# Allegro board PiModProtoMini_R0A.brd
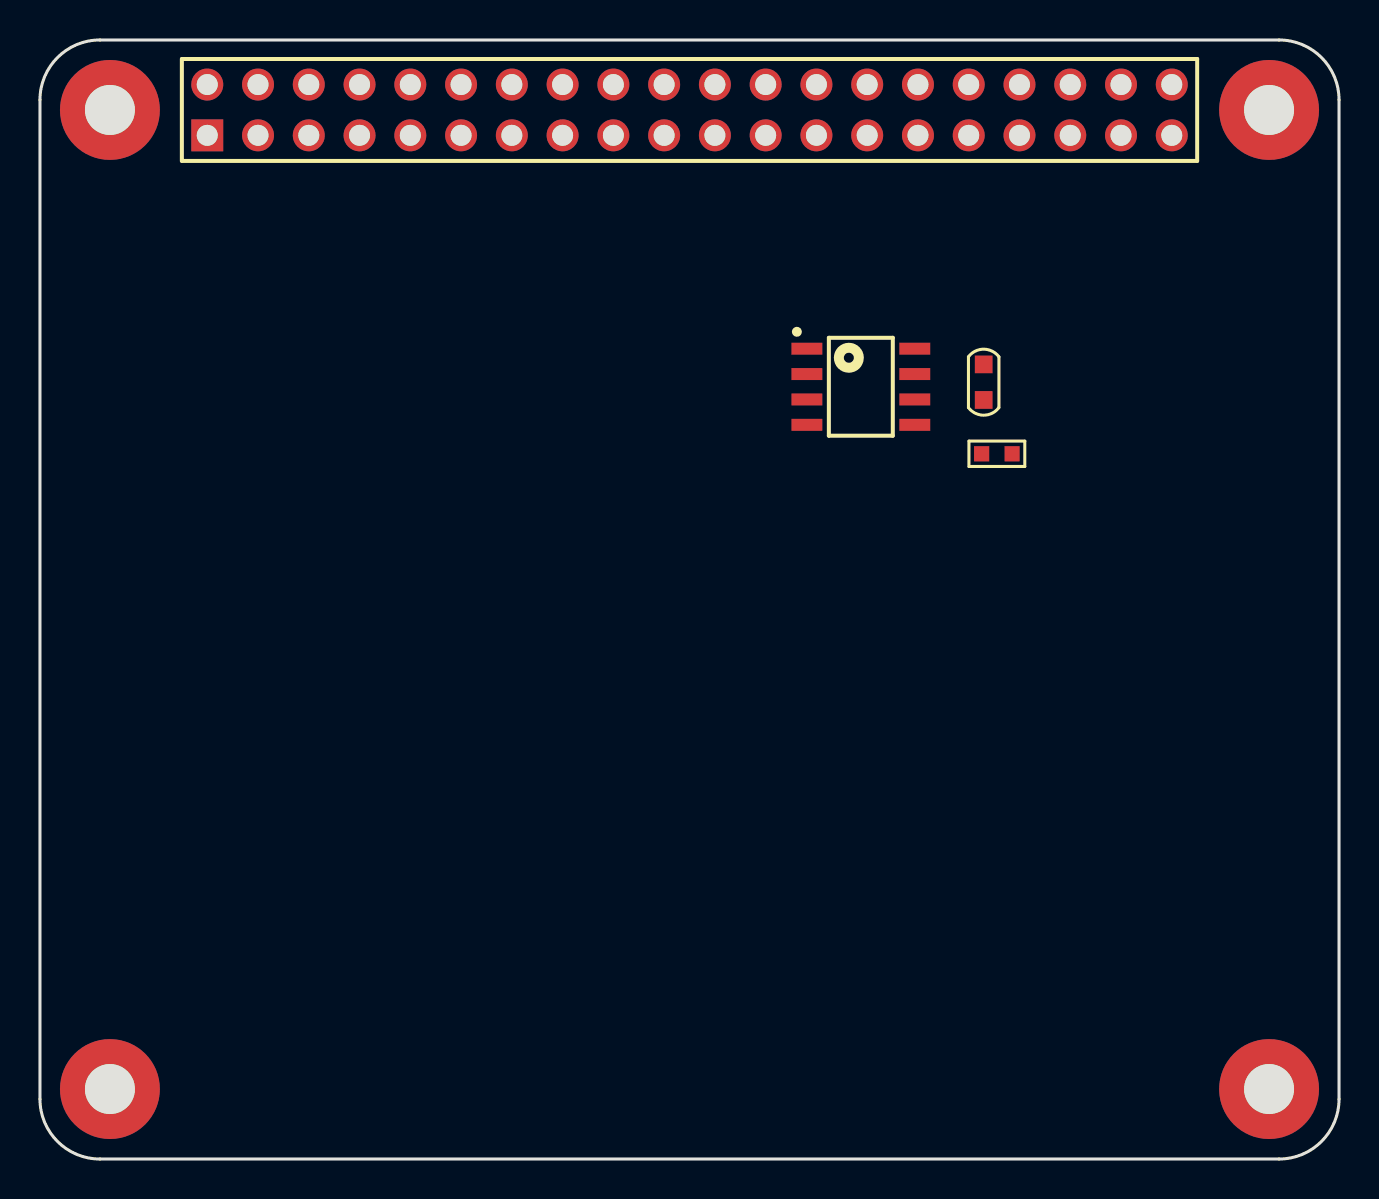
[diagram p0: board, top side]
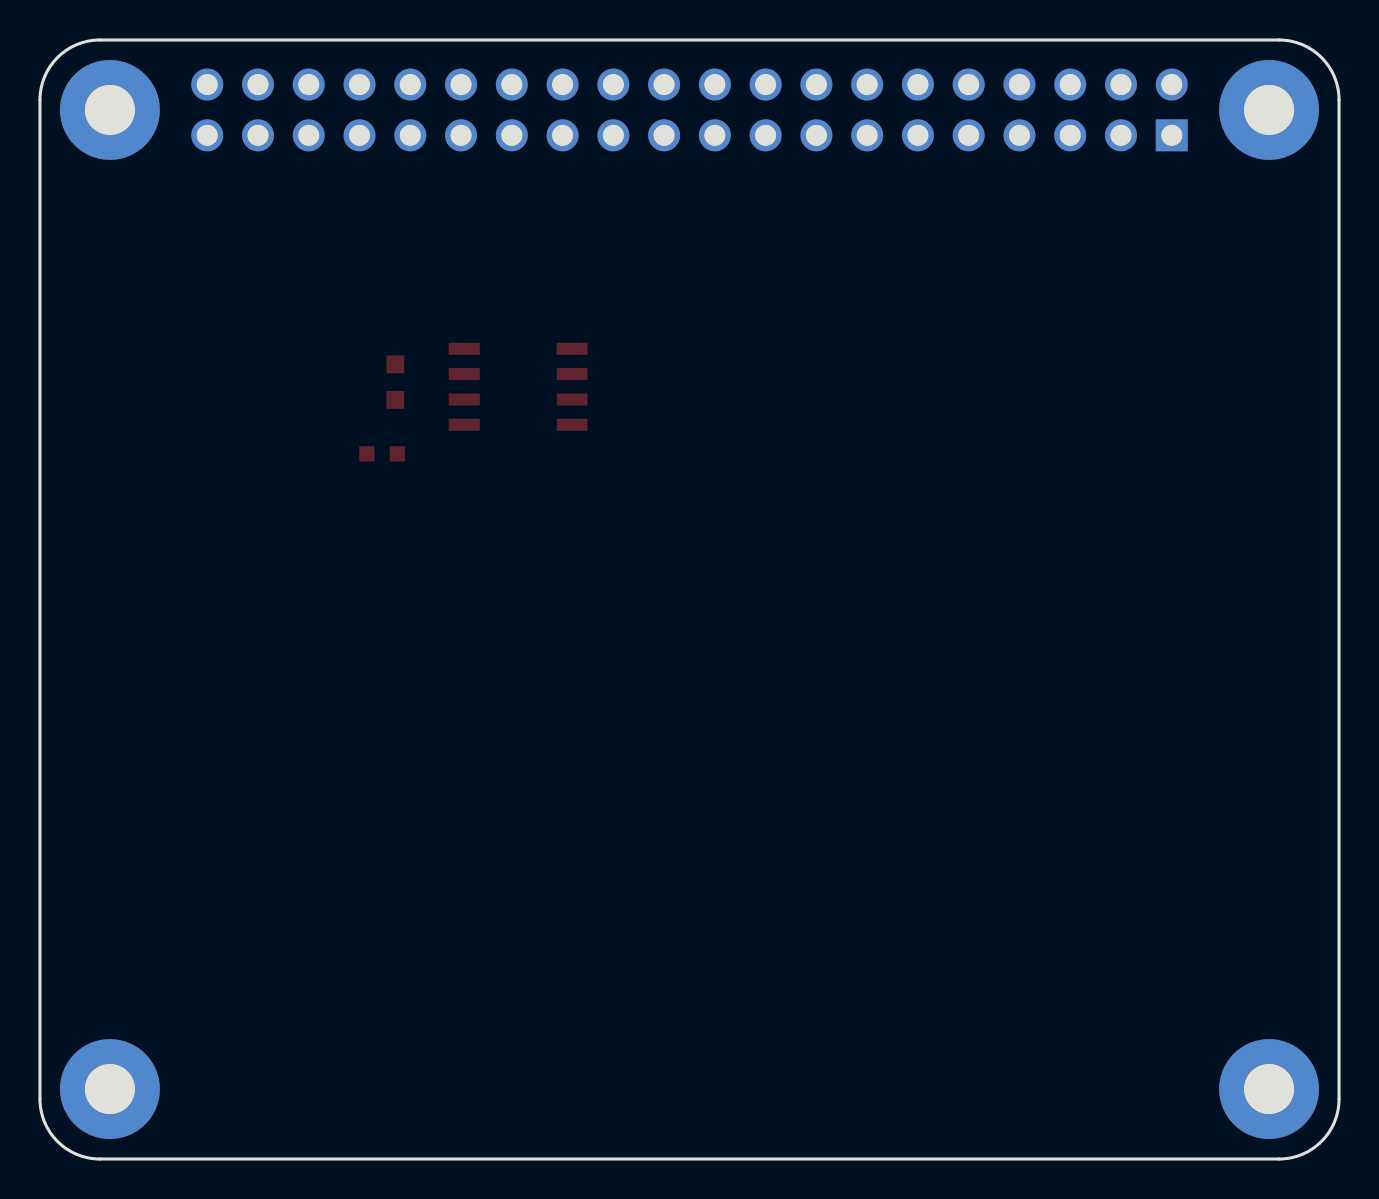
[diagram p1: board, bottom side, seen from below]

Outline 65 x 55.98 mm; copper layers: TOP, BOTTOM. Coordinates in mm from the lower left corner of the outline.
Outline path: 0,52.98 0,3 arc(0.88,0.88) 3,0 62,0 arc(64.12,0.88) 65,3 65,52.98 arc(64.12,55.1) 62,55.98 3,55.98 arc(0.88,55.1) 0,52.98

## Placement (name value [footprint] x y rotation side)
C1  0.1uF  [C0603]  47.22 38.86 0 top
J1  RPI CON  [SIP20X2]  8.37 51.21 0 top
R1  4.7K  [R0603]  47.12 35.28 0 top
TH1  -  [TH2_5]  3.5 3.5 0 top
TH2  -  [TH2_5]  61.5 3.5 0 top
TH3  -  [TH2_5]  3.5 52.48 0 top
TH4  -  [TH2_5]  61.5 52.48 0 top
U1  AT24C02  [SO8]  41.07 38.63 0 top

## Library data of the parts
C1 = CAP NP
J1 = HEADER 20X2
R1 = R
TH1-TH4 = THROUGH_HOLE
U1 = AT24C512

## Footprints (pads in the part's own frame, mm; a bottom-side part is the same pattern mirrored in y, then rotated)
C0603
  rect 0.889x0.889 smd: 1(0,0.889) 2(0,-0.889)
R0603
  rect 0.762x0.762 smd: 1(0,0) 2(1.524,0)
SIP20X2
  rect 1.6x1.6 hole 1.05: 1(0,0)
  round 1.6 hole 1.05: 2(0,2.54) 3(2.54,0) 4(2.54,2.54) 5(5.08,0) 6(5.08,2.54) 7(7.62,0) 8(7.62,2.54) 9(10.16,0) 10(10.16,2.54) 11(12.7,0) 12(12.7,2.54) 13(15.24,0) 14(15.24,2.54) 15(17.78,0) 16(17.78,2.54) 17(20.32,0) 18(20.32,2.54) 19(22.86,0) 20(22.86,2.54) 21(25.4,0) 22(25.4,2.54) 23(27.94,0) 24(27.94,2.54) 25(30.48,0) 26(30.48,2.54) 27(33.02,0) 28(33.02,2.54) 29(35.56,0) 30(35.56,2.54) 31(38.1,0) 32(38.1,2.54) 33(40.64,0) 34(40.64,2.54) 35(43.18,0) 36(43.18,2.54) 37(45.72,0) 38(45.72,2.54) 39(48.26,0) 40(48.26,2.54)
SO8
  rect 1.55x0.6 smd: 1(-2.7,1.905) 2(-2.7,0.635) 3(-2.7,-0.635) 4(-2.7,-1.905) 5(2.7,-1.905) 6(2.7,-0.635) 7(2.7,0.635) 8(2.7,1.905)
TH2_5
  round 5 hole 2.5: 1(0,0)

## Nets
GND: C1.2 J1.6 J1.9 J1.12 J1.18 J1.25 J1.30 J1.34 J1.39 U1.1(A0) U1.2(A1) U1.4(GND)
VDD3V3: C1.1 J1.1 J1.17 R1.1 U1.8(VCC)
VDD5V: J1.2 J1.4
ID_SC: J1.28 U1.6(SCL)
ID_SD: J1.27 U1.5(SDA)
ID_WP: R1.2 U1.7(WP)
N1404454: J1.3
N1404460: J1.5
N1404466: J1.7
N1404645: J1.11
N1404651: J1.13
N1404657: J1.15
N1404661: J1.19
N1404667: J1.21
N1404673: J1.23
N1404687: J1.29
N1404693: J1.31
N1404699: J1.33
N1404705: J1.35
N1404711: J1.37
N1404744: J1.8
N1404756: J1.10
N1404774: J1.14
N1404778: J1.16
N1404798: J1.20
N1404802: J1.22
N1404822: J1.24
N1404826: J1.26
N1404858: J1.36
N1404862: J1.38
N1404874: J1.32
N1404878: J1.40

Pads without a net: TH1 1; TH2 1; TH3 1; TH4 1; U1 3
